# EAGLE board d11_micro_std_vcp_v3 (EAGLE 7.3.0)
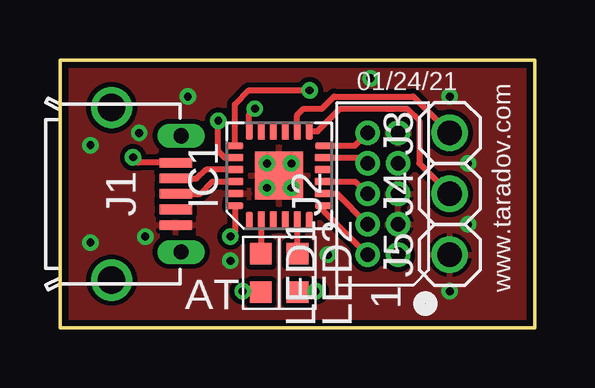
[diagram p0: board, top side]
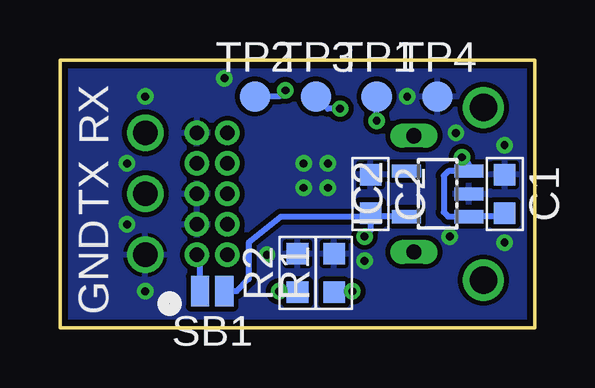
[diagram p1: board, bottom side, seen from below]

Size 19.81 x 11.18 mm. Coordinates in mm from the lower left corner, seen from the top.
Outline: 0,0 19.81,0 19.81,11.18 0,11.18 0,0
Copper layers (1*16): Top 0.0356mm / dielectric 1.5011mm / Bottom 0.0356mm
Design rules "std-tented-new": minimum track width 8mil, minimum drill 13mil, track to track 6mil, track to pad 6mil, pad to pad 6mil, via to via 6mil, smd to smd 0mil, copper to edge 10mil, drill to drill 6mil, minimum pad ring 7mil, minimum via ring 7mil, stop-mask expansion 3mil, vias tented up to drill 25mil, thermal gap 6mil

## Footprints (pad centres in the part's own frame; a part is rotated, then mirrored left to right if it is on the bottom)
SMD0603 = smd 0.9 x 0.9: 1 -0.8,0; 2 0.8,0
QFN24 = smd 0.7 x 0.28: 1 -1.85,1.25; 2 -1.85,0.75; 3 -1.85,0.25; 4 -1.85,-0.25; 5 -1.85,-0.75; 6 -1.85,-1.25; 13 1.85,-1.25; 14 1.85,-0.75; 15 1.85,-0.25; 16 1.85,0.25; 17 1.85,0.75; 18 1.85,1.25 | smd 0.28 x 0.7: 7 -1.25,-1.85; 8 -0.75,-1.85; 9 -0.25,-1.85; 10 0.25,-1.85; 11 0.75,-1.85; 12 1.25,-1.85; 19 1.25,1.85; 20 0.75,1.85; 21 0.25,1.85; 22 -0.25,1.85; 23 -0.75,1.85; 24 -1.25,1.85 | smd 2 x 2: PAD 0,0
SOT23-5 = smd 0.55 x 1.2: 1 -0.95,-1.3; 2 0,-1.3; 3 0.95,-1.3; 4 0.95,1.3; 5 -0.95,1.3
USB-B-MICRO-SMT-SHELL-TH = smd 1.35 x 0.4: 1 4.825,1.3; 2 4.825,0.65; 3 4.825,0; 4 4.825,-0.65; 5 4.825,-1.3 | drill 1.143: M1 2.15,-3.6; M2 2.15,3.6 | drill 0.635 long: M3 5.05,2.425; M4 5.05,-2.425
HEADER-5X2-1.27MM = drill 0.61 pad 1.016: 1 -2.54,-0.635; 2 -2.54,0.635; 3 -1.27,-0.635; 4 -1.27,0.635; 5 0,-0.635; 6 0,0.635; 7 1.27,-0.635; 8 1.27,0.635; 9 2.54,-0.635; 10 2.54,0.635
PIN-TH = drill 1.016: 1 0,0
SB-1.27MM-NO = smd 0.762 x 1.27: 1 -0.508,0; 2 0.508,0
TP-1.27MM = smd 1.27 x 1.27: 1 0,0

## Placement (x,y rotation side)
C1  1uF  [SMD0603]  1.27,5.59 270 bottom
C2  1uF  [SMD0603]  6.86,5.59 270 bottom
IC1  ATSAMD11D  [QFN24]  9.14,6.35 90 top
IC2  MIC5504-3.3  [SOT23-5]  4.06,5.59 90 bottom
J1  [USB-B-MICRO-SMT-SHELL-TH]  0,5.59 0 top
J2  HEADER-5X2-TH-1.27  [HEADER-5X2-1.27MM]  13.46,5.59 90 top
J3  RX  [PIN-TH]  16.26,8.13 90 top
J4  TX  [PIN-TH]  16.26,5.59 90 top
J5  GND  [PIN-TH]  16.26,3.05 90 top
LED1  ORANGE  [SMD0603]  8.38,2.29 270 top
LED2  GREEN  [SMD0603]  9.91,2.29 270 top
R1  10K  [SMD0603]  8.38,2.29 90 bottom
R2  10K  [SMD0603]  9.91,2.29 90 bottom
SB1  [SB-1.27MM-NO]  13.46,1.52 180 bottom
TP1  SIO  [TP-1.27MM]  6.6,9.65 0 bottom
TP2  [TP-1.27MM]  11.68,9.65 0 bottom
TP3  [TP-1.27MM]  9.14,9.65 0 bottom
TP4  [TP-1.27MM]  4.06,9.65 0 bottom

## Library data of the parts
C1 C2 R1 R2 = ataradov_rlc
IC1 = ataradov_mcu
IC2 = ataradov_vreg
J1-J5 = ataradov_conn
LED1 LED2 = ataradov_led
SB1 TP1-TP4 = ataradov_misc

## Nets
+3V3: C2.2 IC1.24 IC2.5 SB1.1
GND: C1.1 C2.1 IC1.23 IC1.PAD IC2.2 J1.5 J2.3 J2.5 J2.9 J5.1 R1.2 R2.2 TP4.1
LED_A: IC1.2 LED1.1
LED_B: IC1.5 LED2.1
N$2: LED1.2 R1.1
N$3: LED2.2 R2.1
RESET: IC1.18 TP3.1
SWCLK: IC1.19 TP2.1
SWDIO: IC1.20 TP1.1
T_RESET: IC1.12 J2.10
T_SWCLK_TCK: IC1.8 J2.4
T_SWDIO_TMS: IC1.7 J2.2
T_TDI: IC1.11 J2.8
T_TDO: IC1.9 J2.6
T_VREF: J2.1 SB1.2
UART_RX: IC1.14 J3.1
UART_TX: IC1.13 J4.1
USB_DM: IC1.21 J1.2
USB_DP: IC1.22 J1.3
V_USB: C1.2 IC2.1 IC2.3 J1.1

## Tracks (layer width: path | path; a pad name or v marks a point on that pad's centre or on a via)
+3V3  (via drill 0.33)
  Top 0.254: IC1.24 7.29,3.99 v7.11,3.81
  Bottom 0.254: IC2.5 6.71,4.64 | 6.71,4.64 C2.2 6.86,4.06 v7.11,3.81 | 6.71,4.64 10.6,4.64 11.94,3.56 11.94,2.03 12.45,1.52 SB1.1
GND  (via drill 0.33 pad 0.25)
  Top 0.254: IC1.PAD v8.64,5.84
  other vias: 16.26,9.65 16.26,1.52 1.27,7.62 1.27,3.56 3.3,8.13 3.56,3.81 8.64,6.86 9.65,6.86 9.65,5.84 5.33,9.65 17.02,4.32 12.95,10.41 11.18,3.05 17.02,6.86 7.11,2.79
  pour Bottom (isolate 0.203): 0,11.18 19.81,11.18 19.81,0 0,0
  pour Top (isolate 0.203): 0,11.18 19.81,11.18 19.81,0 0,0
LED_A
  Top 0.254: IC1.2 8.39,3.1 LED1.1
LED_B
  Top 0.254: IC1.5 9.89,3.1 LED2.1
N$2  (via drill 0.33)
  Top 0.254: LED1.2 7.66,1.49 v7.62,1.52
  Bottom 0.254: LED1.2 7.66,1.49 v7.62,1.52
N$3  (via drill 0.33)
  Top 0.254: LED2.2 10.63,1.49 v10.67,1.52
  Bottom 0.254: LED2.2 10.63,1.49 v10.67,1.52
RESET  (via drill 0.33)
  Top 0.254: IC1.18 7.89,8.91 v8.13,9.14
  Bottom 0.254: v8.13,9.14 8.64,9.14 TP3.1
SWCLK  (via drill 0.33)
  Top 0.254: IC1.19 7.29,9.33 7.87,9.91 v10.41,9.91
  Bottom 0.254: v10.41,9.91 10.67,9.65 TP2.1
SWDIO  (via drill 0.33)
  Top 0.254: IC1.20 6.87,7.1 6.6,7.37 v6.6,8.64
  Bottom 0.254: v6.6,8.64 TP1.1
T_RESET
  Top 0.254: IC1.12 12.3,7.6 J2.10
T_SWCLK_TCK
  Top 0.254: IC1.8 11.54,5.6 J2.4
T_SWDIO_TMS
  Top 0.254: IC1.7 10.99,4.88 J2.2
T_TDI
  Top 0.254: IC1.11 12.59,7.1 J2.8
T_TDO
  Top 0.254: IC1.9 12.31,6.1 J2.6
T_VREF
  Bottom 0.254: SB1.2 13.97,2.92 J2.1
UART_RX
  Top 0.254: J3.1 14.73,9.65 11.43,9.65 10.92,9.14 10.16,9.14 9.89,8.88 IC1.14
UART_TX
  Top 0.254: J4.1 14.99,6.86 14.99,8.64 14.48,9.14 11.68,9.14 10.74,8.2 IC1.13
USB_DM
  Top 0.254: IC1.21 6.1,6.6 5.7,6.24 J1.2
USB_DP
  Top 0.254: J1.3 5.85,5.59 6.35,6.1 IC1.22
V_USB  (via drill 0.33)
  Top 0.254: J1.1 3.27,6.89 v3.05,7.11
  Bottom 0.254: IC2.1 3.62,4.64 3.81,4.83 3.81,6.35 3.62,6.54 IC2.3 2.76,6.83 v3.05,7.11 | IC2.1 2.79,4.61 | C1.2 1.42,4.64 IC2.1

## Text on the board
tPlace: 01/24/21 | www.taradov.com | AT | 1